# Altium PCB BEE-PC_EXP_V100.PcbDoc (part 4 of 7)
Units mm, origin at the board's own origin, x right, y up, seen from the top; angles counter-clockwise.
Board outline 180 x 79.98 mm, 6 copper layers (L1 TOP, L2 GND 1, L3 SIGNAL, L4 PWR, L5 GND 2, L6 BOT), stack 1.536 mm thick; 1146 components, 909 nets, 3933 pads, 1234 vias.
Unrouted connection lines stored in the file: 1783.
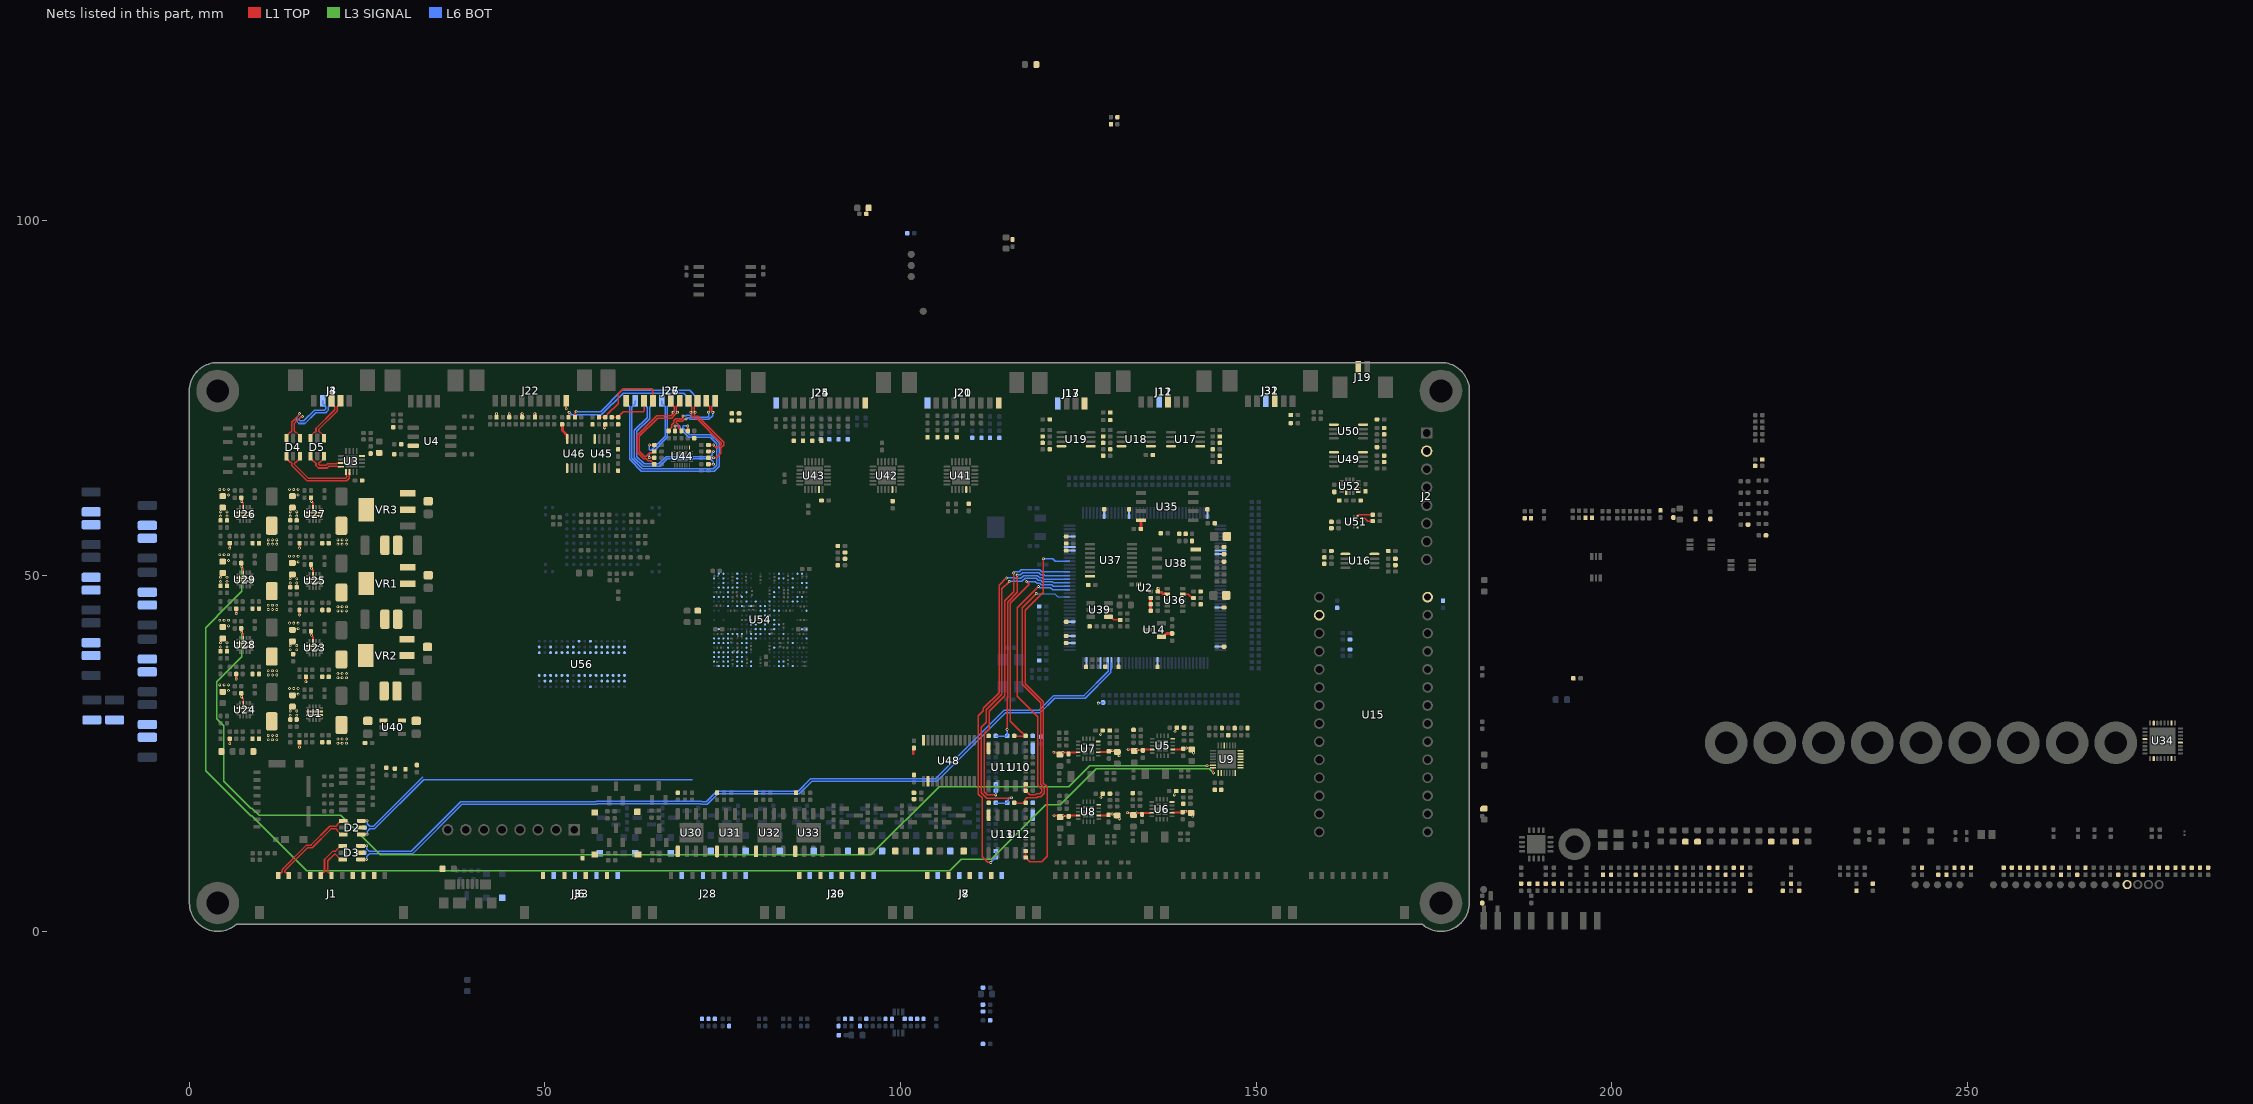
[diagram p4: the nets of this part, all layers, seen from the top]

## Via types
v1: diameter 0.6, hole 0.3, L1 TOP to L6 BOT, 563 vias
v2: diameter 0.4, hole 0.2, L1 TOP to L6 BOT, tented both sides, 344 vias
v3: diameter 0.4, hole 0.2, L1 TOP to L6 BOT, 327 vias

## Nets (pads, with @x,y where several pads share a name; then routed paths per layer and width w, separated by ;. In a path a pad name is that pad's centre, name@x,y a point inside that pad or via, vN(x,y) a via of type N, cw(c..) or ccw(c..) an arc to the next point about the centre after c; other vN are vias at no path point) (continued)
CAM1_D0_N: (continued)
  L1 TOP w0.18: R211.2@69.2,70.4 69.2,70.425 68.746,70.879 68.746,71.251 68.465,71.532 68.465,71.681 68.57,71.787 68.802,71.787 68.868,71.721 69.321,71.721 69.612,72.012 69.803,72.012 v3(69.845,72.055) ; v3(73.625,73) 73.625,73.06 73.49,73.195 73.49,73.785 73.595,73.89 73.64,73.89 73.95,74.2 J26.1@73.95,74.6
  L6 BOT w0.18: v3(69.845,72.055) 69.889,72.055 70.061,72.226 70.21,72.226 70.436,72 73.037,72 73.583,72.546 73.583,72.958 v3(73.625,73)
CAM1_D0_P: J26.2 R187.2 | length 9.6
  L1 TOP w0.18: R187.2@67.4,70.4 67.4,70.425 67.854,70.879 67.854,71.251 68.135,71.532 68.135,71.818 68.434,72.117 68.939,72.117 69.004,72.051 69.184,72.051 69.379,72.246 69.379,72.437 v3(69.421,72.479) ; J26.2@72.7,74.6 72.7,74.2 73.01,73.89 73.055,73.89 73.16,73.785 73.16,73.195 73.025,73.06 v3(73.025,73)
  L6 BOT w0.18: v3(69.421,72.479) 69.463,72.521 69.889,72.521 69.924,72.556 70.347,72.556 70.573,72.33 72.9,72.33 73.025,72.455 v3(73.025,73)
CAM1_D1_N: J26.3 R215.2 | length 11.8
  L1 TOP w0.18: J26.3@71.45,74.6 71.45,74.2 71.14,73.89 71.095,73.89 70.99,73.785 70.99,73.195 71.125,73.06 v3(71.125,73) 71.125,72.94 70.99,72.805 70.99,72.57 71.095,72.465 71.472,72.465 75.122,68.815 75.122,68.392 74.742,68.012 74.742,67.242 74.1,66.6 v3(73.725,66.6) R215.2@73.025,66.6
CAM1_D1_P: J26.4 R212.2 | length 10.5
  L1 TOP w0.18: J26.4@70.2,74.6 70.2,74.2 70.51,73.89 70.555,73.89 70.66,73.785 70.66,73.195 70.525,73.06 v3(70.525,73) 70.525,72.94 70.66,72.805 70.66,72.434 70.959,72.135 71.335,72.135 74.792,68.678 74.792,68.529 74.256,67.993 74.107,67.993 v3(73.7,68.4) R212.2@73.025,68.4
CAM1_I2C_SCL: J26.8 R189.2 R460.2 | length 11.8
  L1 TOP w0.2: R460.2@57.6,72.325 58.322,72.325 58.413,72.234 58.413,72.238 58.5,72.325 58.5,72.377 58.8,72.677 58.8,72.7 60.3,74.2 60.3,75.6 61,76.3 65,76.3 65.2,76.1 J26.8@65.2,74.6
CAM1_I2C_SDA: J26.9 R188.2 R461.2 | length 6.4
  L1 TOP w0.2: R461.2@59.4,72.325 60.3,72.325 60.3,72.35 61.05,73.1 63.883,73.1 64,73.217 64,74.55 J26.9@63.95,74.6
CAM2_CK_N: J27.5 R306.2 | length 9.6
  L1 TOP w0.18: v3(64.7,68.4) R306.2@65.375,68.4
  L6 BOT w0.18: v3(64.7,68.4) 64.69,68.39 64.69,67.78 64.796,67.675 64.945,67.675 66.91,69.64 66.91,73.785 66.805,73.89 66.76,73.89 66.45,74.2 J27.5@66.45,74.6
CAM2_CK_P: J27.6 R216.2 | length 10.1
  L1 TOP w0.18: v3(64.681,66.62) R216.2@65.356,66.62
  L6 BOT w0.18: v3(64.681,66.62) 64.681,67.23 64.796,67.345 65.082,67.345 67.24,69.503 67.24,73.785 67.345,73.89 67.39,73.89 67.7,74.2 J27.6@67.7,74.6
CAM2_D0_N: J27.1 R321.2 | length 32.8
  L1 TOP w0.18: R321.2@70.1,70.4 v3(70.1,71.075)
  L6 BOT w0.18: J27.1@61.45,74.6 61.45,74.2 61.9,73.75 61.9,66.4 63.56,64.74 73.829,64.74 74.495,65.406 74.495,68.694 73.355,69.834 70.352,69.834 69.365,70.82 69.365,70.97 69.47,71.075 v3(70.1,71.075)
CAM2_D0_P: J27.2 R308.2 | length 31.8
  L1 TOP w0.18: R308.2@68.3,70.4 v3(68.3,71.075)
  L6 BOT w0.18: J27.2@62.7,74.6 62.7,74.2 62.23,73.73 62.23,66.537 63.697,65.07 73.692,65.07 74.165,65.543 74.165,68.557 73.218,69.504 70.215,69.504 69.035,70.684 69.035,70.97 68.93,71.075 v3(68.3,71.075)
CAM2_D1_N: J27.3 R451.2 | length 22.1
  L1 TOP w0.18: R451.2@73.025,65.7 v3(73.7,65.7)
  L6 BOT w0.18: J27.3@63.95,74.6 63.95,74.2 64.41,73.74 64.41,73.01 64.41,72.25 62.6,70.44 62.6,66.633 63.833,65.4 66.167,65.4 67.202,66.435 73.268,66.435 73.543,66.16 73.585,66.16 73.7,66.045 v3(73.7,65.7)
CAM2_D1_P: J27.4 R450.2 | length 21.6
  L1 TOP w0.18: R450.2@73.025,67.5 v3(73.7,67.5)
  L6 BOT w0.18: J27.4@65.2,74.6 65.2,74.2 64.74,73.74 64.74,72.805 64.74,72.113 62.93,70.303 62.93,66.77 63.97,65.73 66.03,65.73 67.065,66.765 73.268,66.765 73.5,66.997 73.5,67.285 73.7,67.485 v3(73.7,67.5)
CAM2_I2C_SCL: J27.8 R453.2 R471.2 | length 19.6
  L1 TOP w0.2: R471.2@53.327,72.325 53.363,72.362 53.363,72.963 v3(53.4,73)
  L6 BOT w0.2: v3(53.4,73) 53.407,73 53.757,72.65 57.946,72.65 60.996,75.7 69.5,75.7 70.2,75 J27.8@70.2,74.6
CAM2_I2C_SDA: J27.9 R452.2 R472.2 | length 20
  L1 TOP w0.2: R472.2@54.227,72.325 54.227,72.89 54.4,73.064 v3(54.4,73.1)
  L6 BOT w0.2: v3(54.4,73.1) 57.831,73.1 60.831,76.1 70.35,76.1 71.45,75 J27.9@71.45,74.6
CONN_USB_1_N: D4.1 U3.14 | length 11.7
  L1 TOP w0.22: D4.1@13.65,66.845 13.65,66.535 14.205,65.98 14.286,65.98 14.415,65.851 14.415,65.516 16.553,63.378 22.139,63.378 22.485,63.723 22.485,64.059 22.53,64.104 22.53,64.61 U3.14@22.55,64.63
CONN_USB_1_P: D4.3 U3.13 | length 10.5
  L1 TOP w0.22: D4.3@15.55,66.845 15.55,66.535 14.995,65.98 14.914,65.98 14.785,65.851 14.785,65.669 16.706,63.748 21.986,63.748 22.115,63.876 22.115,64.059 22.07,64.104 22.07,64.61 U3.13@22.05,64.63
CONN_USB_1_R_N: D4.6 J3.3 | length 12.4
  L1 TOP w0.22: D4.6@13.65,69.355 13.65,69.665 14.205,70.22 14.286,70.22 14.415,70.349 14.415,71.601 15.441,72.627 15.441,72.79 v3(15.476,72.824)
  L6 BOT w0.22: v3(15.476,72.824) 15.441,72.79 15.441,72.627 15.074,72.26 15.074,71.771 15.42,71.425 16.26,71.425 17.779,72.944 19.188,72.944 19.56,73.317 19.56,73.781 19.689,73.91 19.71,73.91 20,74.2 J3.3@20,74.6
CONN_USB_1_R_P: D4.4 J3.2 | length 10.5
  L1 TOP w0.22: D4.4@15.55,69.355 15.55,69.665 14.995,70.22 14.914,70.22 14.785,70.349 14.785,71.448 15.703,72.366 15.866,72.366 v3(15.9,72.4)
  L6 BOT w0.22: v3(15.9,72.4) 15.866,72.366 15.703,72.366 15.444,72.107 15.444,71.924 15.573,71.795 16.107,71.795 17.626,73.314 19.034,73.314 19.19,73.47 19.19,73.781 19.061,73.91 19.04,73.91 18.75,74.2 J3.2@18.75,74.6
CONN_USB_2_N: D5.1 U3.12 | length 5.5
  L1 TOP w0.22: D5.1@17.05,66.845 17.05,66.535 17.605,65.98 17.686,65.98 17.815,65.851 17.815,65.516 18.161,65.17 19.382,65.17 19.627,65.415 20.759,65.415 20.804,65.37 21.31,65.37 U3.12@21.33,65.35
CONN_USB_2_P: D5.3 U3.11 | length 4.9
  L1 TOP w0.22: D5.3@18.95,66.845 18.95,66.535 18.395,65.98 18.314,65.98 18.185,65.851 18.185,65.669 18.314,65.54 19.229,65.54 19.474,65.785 20.759,65.785 20.804,65.83 21.31,65.83 U3.11@21.33,65.85
CONN_USB_2_R_N: D5.6 J4.3 | length 6.9
  L1 TOP w0.22: D5.6@17.05,69.355 17.05,69.665 17.605,70.22 17.686,70.22 17.815,70.349 17.815,70.721 20.44,73.346 20.44,73.781 20.311,73.91 20.29,73.91 20,74.2 J4.3@20,74.6
CONN_USB_2_R_P: D5.4 J4.2 | length 6.9
  L1 TOP w0.22: D5.4@18.95,69.355 18.95,69.665 18.395,70.22 18.314,70.22 18.185,70.349 18.185,70.567 20.81,73.192 20.81,73.781 20.939,73.91 20.96,73.91 21.25,74.2 J4.2@21.25,74.6
DDR_A0: U54.W6 U56.N3
DDR_A1: U54.P6 U56.P7
DDR_A2: U54.V5 U56.P3
DDR_A3: U54.V6 U56.N2
DDR_A4: U54.R6 U56.P8
DDR_A5: U54.W4 U56.P2
DDR_A6: U54.P7 U56.R8
DDR_A7: U54.W2 U56.R2
DDR_A8: U54.L8 U56.T8
DDR_A9: U54.V4 U56.R3
DDR_A10: U54.T3 U56.L7
DDR_A11: U54.M9 U56.R7
DDR_A12: U54.P5 U56.N7
DDR_A13: U54.V2 U56.T3
DDR_A14: U54.L9 U56.T7
DDR_A15: U54.R4 U56.M7
DDR_BA0: U54.V8 U56.M2
DDR_BA1: U54.P4 U56.N8
DDR_BA2: U54.R8 U56.M3
DDR_CAS: U54.T8 U56.K3
DDR_CK_N: U54.T4 U56.K7
DDR_CK_P: U54.U4 U56.J7
DDR_CKE: U54.V3 U56.K9
DDR_CS: U54.V7 U56.L2
DDR_D0: U54.N2 U56.E3
DDR_D1: U54.M7 U56.F7
DDR_D2: U54.R3 U56.F2
DDR_D3: U54.M8 U56.F8
DDR_D4: U54.T2 U56.H3
DDR_D5: U54.N8 U56.H8
DDR_D6: U54.T1 U56.G2
DDR_D7: U54.N7 U56.H7
DDR_D8: U54.Y7 U56.D7
DDR_D9: U54.AA4 U56.C3
DDR_D10: U54.Y9 U56.C8
DDR_D11: U54.Y3 U56.C2
DDR_D12: U54.AA7 U56.A7
DDR_D13: U54.AA3 U56.A2
DDR_D14: U54.W7 U56.B8
DDR_D15: U54.W3 U56.A3
DDR_DQM0: U54.N1 U56.E7
DDR_DQM1: U54.Y4 U56.D3
DDR_DQS0_N: U54.R2 U56.G3
DDR_DQS0_P: U54.R1 U56.F3
DDR_DQS1_N: U54.AA6 U56.B7
DDR_DQS1_P: U54.Y6 U56.C7
DDR_ODT: U54.W1 U56.K1
DDR_RAS: U54.U8 U56.J3
DDR_RESET: R574.2 U54.V1 U56.T2
DDR_VREF: C331.1 C339.2 C347.1 C353.1 C354.1 R576.2 R578.1 U54.Y1 U56.H1 U56.M8
DDR_WE: U54.N10 U56.L3
DDR_ZQ: R575.2 U54.AA2
eFUSE_ILIM_5/12V_Solenoid: R106.2 R230.2 U24.9 | length 1.5
  L1 TOP w0.25: R230.2@7.3,33.475 7.356,33.419 7.356,33.001 7.414,32.943 7.414,32.918 7.584,32.748 U24.9@7.584,32.109
  other v2: 7.385,32.972
eFUSE_ILIM_5V: R124.1 R245.2 U25.9 | length 1.5
  L1 TOP w0.25: R245.2@17.1,51.575 17.156,51.519 17.156,51.101 17.214,51.043 17.214,51.018 17.384,50.848 U25.9@17.384,50.209
  other v2: 17.185,51.072
eFUSE_ILIM_5V_HD4: R270.2 U9.7 U29.9 | length 186.7
  L1 TOP w0.15: U9.7@143.965,23 144,22.965 v3(144,22.3)
  L1 TOP w0.25: R270.2@7.3,51.775 7.356,51.719 7.356,51.301 7.414,51.243 7.414,51.218 7.584,51.048 U29.9@7.584,50.409
  L3 SIGNAL w0.2: v2(7.385,51.272) 7.385,47.822 5.564,46 2.3,42.736 2.3,22.564 8.614,16.25 8.786,16.25 16.486,8.55 106.95,8.55 108.55,10.15 112.786,10.15 120.434,17.798 122.484,17.798 127.536,22.85 143.45,22.85 v3(144,22.3)
eFUSE_ILIM_5V_MCU: R123.1 R226.2 U23.9 | length 1.5
  L1 TOP w0.25: R226.2@17.1,42.175 17.156,42.119 17.156,41.701 17.214,41.643 17.214,41.618 17.384,41.448 U23.9@17.384,40.809
  other v2: 17.185,41.672
eFUSE_ILIM_5V_TEC: R262.2 U9.6 U28.9 | length 172.9
  L1 TOP w0.15: v3(143.1,23.3) 143.168,23.3 143.268,23.4 U9.6@143.965,23.4
  L1 TOP w0.25: R262.2@7.3,42.575 7.356,42.519 7.356,42.101 v2(7.385,42.072) ; v2@7.414,42.018 7.584,41.848 U28.9@7.584,41.209
  L3 SIGNAL w0.2: v2(7.385,42.072) 7.385,38.622 5.564,36.8 3.843,35.079 3.843,29.907 4.85,28.9 4.85,21.114 8.614,17.35 8.786,17.35 9.811,16.326 21.282,16.326 26.858,10.75 95.855,10.75 105.466,20.361 123.648,20.361 126.586,23.3 v3(143.1,23.3)
eFUSE_ILIM_12V_Laser: R261.2 U9.8 U27.9 | length 1.5
  L1 TOP w0.25: R261.2@17.1,60.975 17.156,60.919 17.156,60.501 17.214,60.443 17.214,60.418 17.384,60.248 U27.9@17.384,59.609
  other v2: 17.185,60.472
eFUSE_ILIM_12V_Photo: R246.2 U9.9 U26.9 | length 1.5
  L1 TOP w0.25: R246.2@7.3,60.975 7.356,60.919 7.356,60.501 7.414,60.443 7.414,60.418 7.584,60.248 U26.9@7.584,59.609
  other v2: 7.385,60.472

## Text inside footprints (layer, text, board x,y; h text height)
C236: Top Courtyard "C" at 86.425,49.8 h0.2
C237: Top Courtyard "C" at 83.975,48.1 h0.2 r180
C238: Top Courtyard "C" at 84.3,49.625 h0.2 r90
C239: Top Courtyard "C" at 83.975,47.6 h0.2 r180
C240: Top Courtyard "C" at 83.975,47.1 h0.2 r180
C241: Top Courtyard "C" at 76.475,45.2 h0.2 r180
C242: Top Courtyard "C" at 74.475,45.9 h0.2 r180
C243: Top Courtyard "C" at 86.125,45.6 h0.2
C244: Top Courtyard "C" at 86.025,47.6 h0.2
C245: Top Courtyard "C" at 82.4,49.525 h0.2 r90
C246: Top Courtyard "C" at 81.7,47.625 h0.2 r90
C247: Top Courtyard "C" at 86.125,43.7 h0.2
C248: Top Courtyard "C" at 84.125,45 h0.2
C249: Top Courtyard "C" at 79.2,47.525 h0.2 r90
C251: Top Courtyard "C" at 80.4,49.587 h0.2 r90
C252: Top Courtyard "C" at 78.4,49.525 h0.2 r90
C254: Top Courtyard "C" at 76.5,49.525 h0.2 r90
C255: Top Courtyard "C" at 78.8,45.425 h0.2 r90
C256: Top Courtyard "C" at 83.725,46.3 h0.2
C257: Top Courtyard "C" at 81.8,42.25 h0.2 r270
C258: Top Courtyard "C" at 81.7,45.525 h0.2 r90
C259: Top Courtyard "C" at 76.3,46.775 h0.2 r270
C260: Top Courtyard "C" at 76.625,47.6 h0.2
C261: Top Courtyard "C" at 83,40.375 h0.2 r270
C262: Top Courtyard "C" at 83.65,42.925 h0.2 r90
C263: Top Courtyard "C" at 74.475,47.8 h0.2 r180
C264: Top Courtyard "C" at 74.175,50.1 h0.2 r180
C265: Top Courtyard "C" at 80.2,38.075 h0.2 r270
C268: Top Courtyard "C" at 86.4,37.675 h0.2 r270
C269: Top Courtyard "C" at 86.025,39.8 h0.2
C270: Top Courtyard "C" at 86.025,41.7 h0.2
C272: Top Courtyard "C" at 84.1,37.975 h0.2 r270
C274: Top Courtyard "C" at 83.275,41.3 h0.2 r180
C275: Top Courtyard "C" at 83.887,40 h0.2 r180
C276: Top Courtyard "C" at 84.3,40.825 h0.2 r90
C277: Top Courtyard "C" at 81.5,39.975 h0.2 r270
C279: Top Courtyard "C" at 280.633,13.746 h0.2 r90
C281: Top Courtyard "C" at 78.037,43.9 h0.2 r180
C283: Top Courtyard "C" at 77.225,46.3 h0.2
C284: Top Courtyard "C" at 77.225,47.1 h0.2
C332: Top Courtyard "C" at 78.9,39.975 h0.2 r270
C333: Top Courtyard "C" at 78.725,42.25 h0.2 r180
C334: Top Courtyard "C" at 79.725,43.7 h0.2
C335: Top Courtyard "C" at 79.4,45.425 h0.2 r90
C336: Top Courtyard "C" at 78.3,38.075 h0.2 r270
C337: Top Courtyard "C" at 78.1,45.325 h0.2 r90
C338: Top Courtyard "C" at 77,40.275 h0.2 r270
C340: Top Courtyard "C" at 77.325,41.4 h0.2
C341: Top Courtyard "C" at 76.475,42.6 h0.2 r180
C342: Top Courtyard "C" at 76.3,37.975 h0.2 r270
C344: Top Courtyard "C" at 76.787,39.3 h0.2
C345: Top Courtyard "C" at 76.3,40.825 h0.2 r90
C346: Top Courtyard "C" at 74.638,41.9 h0.2 r180
C348: Top Courtyard "C" at 74.1,37.675 h0.2 r270
C349: Top Courtyard "C" at 74.425,39.8 h0.2
U22: Bottom Overlay "A" at 50.586,63.2 h1.27 r90; Bottom Overlay "U" at 66.886,63.1 h1.27 r90; Bottom Overlay "1" at 48.686,59 h1.27; Bottom Overlay "10" at 48.886,49.9 h1.27; Bottom Assembly "A" at 50.721,63.418 h1.27 r90; Bottom Assembly "U" at 66.721,63.418 h1.27 r90; Bottom Assembly "1" at 48.396,58.965 h1.27; Bottom Assembly "10" at 48.396,49.965 h1.27
U34: Top Assembly "1" at 275.184,28.701 h0.76 r270
U35: Top Component Outline "*" at 140.121,58.341 h1.27 r180
U47: Top Component Outline "*" at 72.658,92.884 h1.27
U54: Bottom Assembly "A1" at 86.125,37 h1 r270
U56: Top Overlay "A" at 49.835,43.29 h1.27 r90; Top Overlay "T" at 61.835,43.29 h1.27 r90; Top Overlay "1" at 47.516,41.435 h1.27 r180; Top Overlay "9" at 47.516,35.035 h1.27 r180; Bottom Overlay "A" at 49.835,43.925 h1.27 r90; Bottom Overlay "T" at 61.835,43.925 h1.27 r90; Bottom Overlay "1" at 47.516,40.165 h1.27; Bottom Overlay "9" at 47.516,33.765 h1.27; Bottom Overlay "RefDes" at 55.835,39.505 h1.27 r90; Bottom Overlay "REFDES" at 55.835,39.823 h1.27 r90; Mechanical 13 "A" at 49.835,43.925 h1.27 r90; Mechanical 13 "T" at 61.835,43.925 h1.27 r90; Mechanical 13 "1" at 47.516,40.165 h1.27; Mechanical 13 "9" at 47.516,33.765 h1.27; Mechanical 13 "RefDes2" at 55.835,39.823 h1.27 r90
Y2: Top Assembly "1" at 203.202,12.046 h0.4
Y4: Top Assembly "1" at 248.302,12.746 h0.4